# Altium PCB Test_Board.PcbDoc
Units mm, origin at the board's own origin, x right, y up, seen from the top; angles counter-clockwise.
Board outline 85.6 x 53.98 mm, 2 copper layers (Top Layer, Bottom Layer); 11 components, 9 nets, 30 pads, 0 vias.
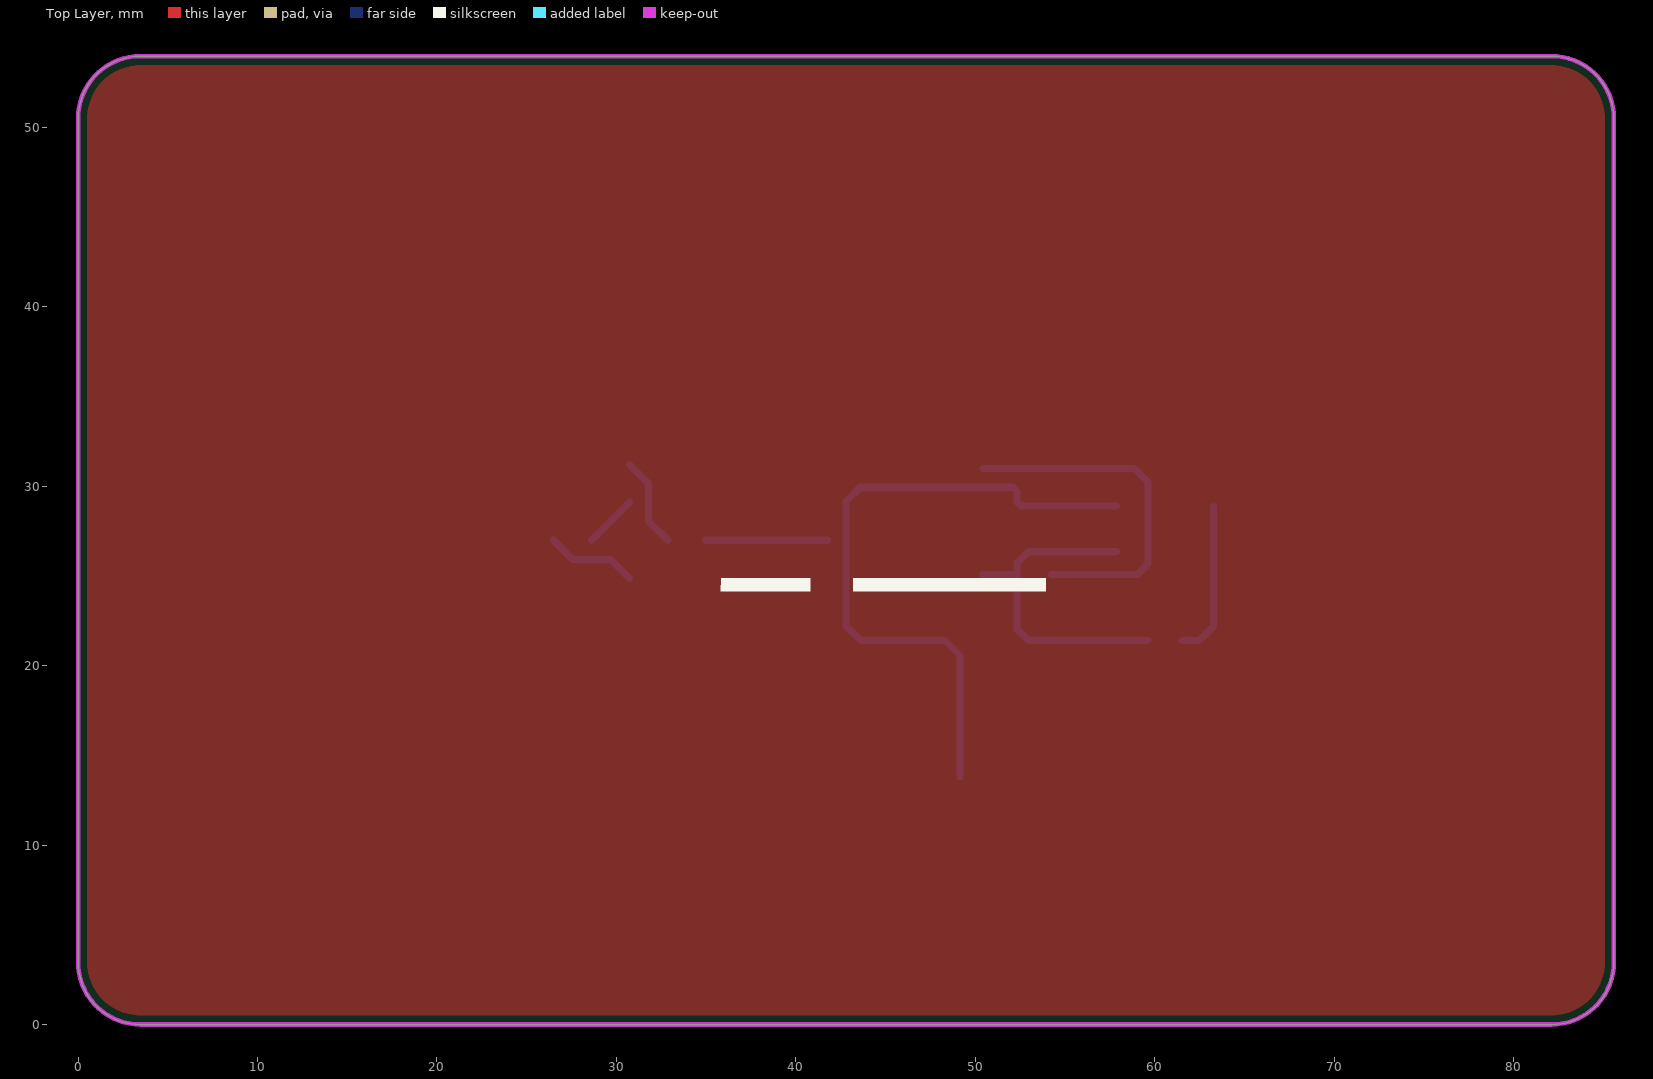
[diagram p0: Top Layer view]
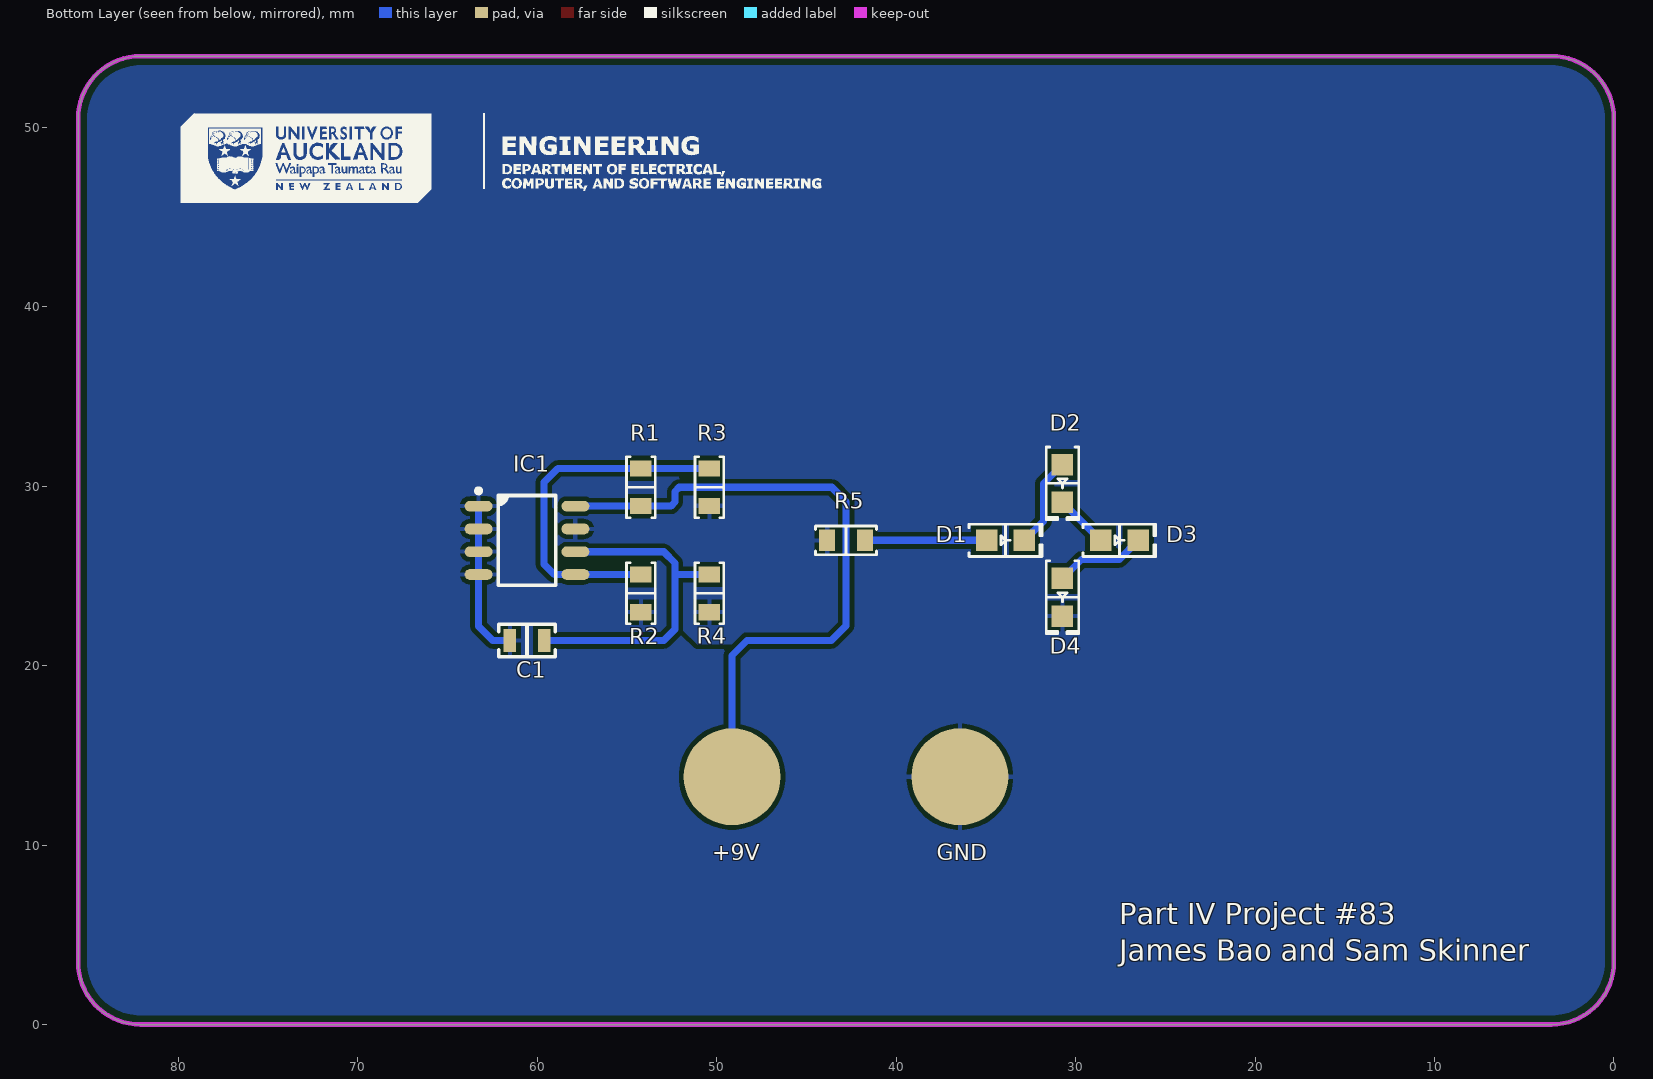
[diagram p1: Bottom Layer view, seen from below]

## Layer stack, top to bottom
Top Solder: solder mask 0.0102, Solder Resist, Dk 3.5
Top Layer: signal copper 0.0356
Dielectric 1: dielectric 0.32, FR-4, Dk 4.8
Bottom Layer: signal copper 0.0356
Bottom Solder: solder mask 0.0102, Solder Resist, Dk 3.5

## Board outline
0,3.469 ccw(c3.469,3.469) 3.469,0 82.129,0 ccw(c82.129,3.469) 85.598,3.469 85.598,50.506 ccw(c82.129,50.506) 82.129,53.975 3.469,53.975 ccw(c3.469,50.506) 0,50.506
cut-out: -60.96,-46.101 -60.706,-46.101 -60.706,-45.847 -60.96,-45.847
cut-out: -60.96,-46.101 -60.706,-46.101 -60.706,-45.847 -60.96,-45.847
cut-out: -60.96,-46.101 -60.706,-46.101 -60.706,-45.847 -60.96,-45.847
cut-out: -60.96,-46.101 -60.706,-46.101 -60.706,-45.847 -60.96,-45.847
cut-out: -60.96,-46.101 -60.706,-46.101 -60.706,-45.847 -60.96,-45.847

## Design rules (kind name [scope] priority, off if disabled: settings)
BoardOutlineClearance [All] p1: gap=0.508 ignorepadtopadclearanceinfootprint=FALSE
Clearance [All] p1: gap=0.254 ignorepadtopadclearanceinfootprint=FALSE except(0: Arc-Hole Track-Hole SMDPad-Hole THPad-Hole Via-Hole Fill-Hole Poly-Hole Region-Hole Text-Hole)
PolygonConnect [All] p1: connectstyle=Relief reliefconductorwidth=0.254 reliefentries=4 polygonreliefangle="90 Angle" airgapwidth=0.254
RoutingVias [All] p1: holewidth=0.711 width=1.27 viastyle="Through Hole" minholewidth=0.711 minwidth=1.27 maxholewidth=0.711 maxwidth=1.27
SilkToSolderMaskClearance [IsPad] p1: minsilkscreentomaskgap=0.15 clearancetoexposedcopper=TRUE
SolderMaskExpansion [All] p1: expansion=0.102 istentingtop=FALSE
SupplyNets "Schematic Supply Nets_1" [InNet('+9V')] p1: voltage=0.000
SupplyNets "Schematic Supply Nets" [InNet('GND')] p2: voltage=0.000
Width [All] p1: maxlimit=10 minlimit=0.254 preferedwidth=0.4
29 further rules are at their usual default settings.

## Components (designator, comment, footprint, x,y, rotation, side; value= is the part's Value field where it differs from the comment)
C1 "0.1 µF" "MURATA GRM21B 0805_2012" 60.579,21.4 r180 bottom
D1 "Green" "LED 0805_2012 GREEN" 33.909,26.988 r180 bottom
D2 "Green" "LED 0805_2012 GREEN" 30.734,30.163 r270 bottom
D3 "Green" "LED 0805_2012 GREEN" 27.559,26.988 r180 bottom
D4 "Green" "LED 0805_2012 GREEN" 30.734,23.813 r270 bottom
IC1 "LM2904DR" "TI SOIC-8 D" 60.579,26.988 r180 bottom
R1 "100 kΩ" "YAGEO RES 0805_2012" 54.229,29.943 r90 bottom
R2 "100 kΩ" "YAGEO RES 0805_2012" 54.229,24.033 r270 bottom
R3 "100 kΩ" "YAGEO RES 0805_2012" 50.419,29.943 r270 bottom
R4 "1 MΩ" "YAGEO RES 0805_2012" 50.419,24.033 r270 bottom
R5 "4.7 Ohms" "YAGEO RES 0805_2012" 42.799,26.988 r180 bottom

## Footprints (in the part's own frame and the unit in brackets; to place one, negate y for a bottom-side part, rotate by r counter-clockwise, add the part's x,y. Pads: shape width x height; smd on the part's side, far side on the other; paste and mask are expansions set on the pad)
"LED 0805_2012 GREEN" [mm] "Chip Diode, 2-Leads, Body 2.00x1.25mm, IPC Medium Density"
  rect 1.2x1.2 smd: 1(-1.05,0) 2(1.05,0)
  silkscreen extent -2.03,-0.9 2.03,0.9, body extent -1,-0.63 1,0.63, height 0.9
"MURATA GRM21B 0805_2012" [mm] "Chip Capacitor, 2-Leads, Body 2.00x1.25mm"
  rect 0.7x1.3 smd: 1(-0.95,0) 2(0.95,0)
  silkscreen extent -1.58,-0.9 1.58,0.9, body extent -1,-0.63 1,0.63, height 1.25
"TI SOIC-8 D" [mm] "SOP, 8-Leads, Body 4.90x3.90mm, Pitch 1.27mm, IPC Medium Density"
  oval 1.55x0.6 smd: 1(-2.7,1.905) 2(-2.7,0.635) 3(-2.7,-0.635) 4(-2.7,-1.905) 5(2.7,-1.905) 6(2.7,-0.635) 7(2.7,0.635) 8(2.7,1.905)
  silkscreen extent -2.83,-2.5 1.6,2.88, body extent -3.01,-2.45 3.01,2.45, height 1.5
"YAGEO RES 0805_2012" [mm] "Chip Resistor, 2-Leads, Body 2.00x1.25mm"
  rect 0.9x1.2 smd: 1(-1.05,0) 2(1.05,0)
  silkscreen extent -1.7,-0.8 1.7,0.8, body extent -1,-0.62 1,0.63, height 0.6

## Part data
C1: library part GRM21B7U1A104JA01L, "CAP CER 0.1UF 10V U2J 0805"
D1 D2 D3 D4: library part LTST-C170KGKT, "LED GREEN CLEAR SMD"
IC1: "IC OPAMP GP 2 CIRCUIT 8SOIC"
R1 R2 R3: library part RT0805DRD07100KL, "RES SMD 100K OHM 0.5% 1/8W 0805"
R4: library part RT0805BRD071ML, "RES SMD 1M OHM 0.1% 1/8W 0805"
R5: library part AC0805FR-7W4R7L, "RES CHIP 0805"

## Free pads (board coordinates)
  round 5.4 smd far side paste-2539.97: 2(49.149,13.81) 3(36.449,13.81)

## Nets (pads, with @x,y where several pads share a name; then routed paths per layer and width w, separated by ;. In a path a pad name is that pad's centre, name@x,y a point inside that pad or via, vN(x,y) a via of type N, cw(c..) or ccw(c..) an arc to the next point about the centre after c; other vN are vias at no path point)
+9V: IC1.8 pad.2 R1.1 | length 36.9
  Bottom Layer w0.4: pad.2 49.149,20.574 48.323,21.4 43.622,21.4 42.799,22.223 42.799,29.147 43.595,29.943 52.09,29.943 52.324,29.708 52.324,29.127 52.558,28.893 IC1.8
GND: C1.1 D4.2 IC1.1 IC1.2 IC1.3 IC1.4 pad.3 R2.2 | length 8.8
  Bottom Layer w0.4: C1.1 62.484,21.4 63.279,22.195 IC1.4 IC1.3 IC1.2 IC1.1
INV: C1.2 IC1.6 R4.1 | length 19
  Bottom Layer w0.4: R4.1 52.324,25.083 ; IC1.6 52.959,26.353 52.324,25.718 52.324,25.083 ; C1.2 52.959,21.4 52.324,22.035 52.324,25.083
NetD1_2: D1.2 D2.1 | length 5.1
  Bottom Layer w0.4: D2.1 31.797,30.15 31.797,28.05 D1.2
NetD2_2: D2.2 D3.1 | length 3
  Bottom Layer w0.4: D3.1 D2.2
NetD3_2: D3.2 D4.1 | length 5.1
  Bottom Layer w0.4: D3.2 27.572,25.925 29.672,25.925 D4.1
NON_INV: IC1.5 R1.2 R2.1 R3.1 | length 19.7
  Bottom Layer w0.4: R3.1@50.453,30.993 R1.2 58.86,30.993 59.629,30.224 59.629,25.657 59.055,25.083 R2.1
V_LEDS: D1.1 R5.2 | length 6.8
  Bottom Layer w0.4: D1.1 R5.2
V_OUT: IC1.7 R3.2 R4.2 R5.1

## Polygon pours and split planes (outlines as drawn)
no net on Top Solder "NONET_L-01_P-001" (solid): 81.788,3.81 81.28,3.81 cw(c81.28,3.937) 81.153,3.937 81.153,4.318 cw(c81.28,4.318) 81.28,4.445 81.661,4.445 cw(c81.661,4.318) 81.788,4.318
no net on Top Solder "NONET_L-01_P-001" (solid): 3.81,13.81 4.318,13.81 cw(c4.318,13.683) 4.445,13.683 4.445,13.302 cw(c4.318,13.302) 4.318,13.175 3.937,13.175 cw(c3.937,13.302) 3.81,13.302
no net on Top Solder "NONET_L-01_P-001" (solid): 42.799,3.81 42.799,3.302 cw(c42.672,3.302) 42.672,3.175 42.291,3.175 cw(c42.291,3.302) 42.164,3.302 42.164,3.683 cw(c42.291,3.683) 42.291,3.81
no net on Top Solder "NONET_L-01_P-001" (solid): 3.81,26.987 3.81,26.479 cw(c3.683,26.479) 3.683,26.352 3.302,26.352 cw(c3.302,26.479) 3.175,26.479 3.175,26.86 cw(c3.302,26.86) 3.302,26.987
no net on Top Solder "NONET_L-01_P-001" (solid): 71.788,50.165 71.28,50.165 cw(c71.28,50.292) 71.153,50.292 71.153,50.673 cw(c71.28,50.673) 71.28,50.8 71.661,50.8 cw(c71.661,50.673) 71.788,50.673
no net on Top Solder "NONET_L-01_P-001" (solid): 81.788,50.165 81.788,50.673 cw(c81.915,50.673) 81.915,50.8 82.296,50.8 cw(c82.296,50.673) 82.423,50.673 82.423,50.292 cw(c82.296,50.292) 82.296,50.165
no net on Top Solder "NONET_L-01_P-001" (solid): 42.799,50.165 42.291,50.165 cw(c42.291,50.292) 42.164,50.292 42.164,50.673 cw(c42.291,50.673) 42.291,50.8 42.672,50.8 cw(c42.672,50.673) 42.799,50.673
no net on Top Solder "NONET_L-01_P-001" (solid): 3.81,3.81 3.81,4.318 cw(c3.937,4.318) 3.937,4.445 4.318,4.445 cw(c4.318,4.318) 4.445,4.318 4.445,3.937 cw(c4.318,3.937) 4.318,3.81
no net on Top Solder "NONET_L-01_P-001" (solid): 81.788,40.165 82.296,40.165 cw(c82.296,40.038) 82.423,40.038 82.423,39.657 cw(c82.296,39.657) 82.296,39.53 81.915,39.53 cw(c81.915,39.657) 81.788,39.657
no net on Top Solder "NONET_L-01_P-001" (solid): 81.788,50.165 81.788,49.657 cw(c81.661,49.657) 81.661,49.53 81.28,49.53 cw(c81.28,49.657) 81.153,49.657 81.153,50.038 cw(c81.28,50.038) 81.28,50.165
no net on Top Solder "NONET_L-01_P-001" (solid): 81.788,26.987 81.788,27.495 cw(c81.915,27.495) 81.915,27.622 82.296,27.622 cw(c82.296,27.495) 82.423,27.495 82.423,27.114 cw(c82.296,27.114) 82.296,26.987
no net on Top Solder "NONET_L-01_P-001" (solid): 81.788,40.165 81.28,40.165 cw(c81.28,40.292) 81.153,40.292 81.153,40.673 cw(c81.28,40.673) 81.28,40.8 81.661,40.8 cw(c81.661,40.673) 81.788,40.673
no net on Top Solder "NONET_L-01_P-001" (solid): 71.788,40.165 71.788,40.673 cw(c71.915,40.673) 71.915,40.8 72.296,40.8 cw(c72.296,40.673) 72.423,40.673 72.423,40.292 cw(c72.296,40.292) 72.296,40.165
no net on Top Solder "NONET_L-01_P-001" (solid): 3.81,50.165 3.302,50.165 cw(c3.302,50.292) 3.175,50.292 3.175,50.673 cw(c3.302,50.673) 3.302,50.8 3.683,50.8 cw(c3.683,50.673) 3.81,50.673
no net on Top Solder "NONET_L-01_P-001" (solid): 42.799,50.165 43.307,50.165 cw(c43.307,50.038) 43.434,50.038 43.434,49.657 cw(c43.307,49.657) 43.307,49.53 42.926,49.53 cw(c42.926,49.657) 42.799,49.657
no net on Top Solder "NONET_L-01_P-001" (solid): 13.81,3.81 13.302,3.81 cw(c13.302,3.937) 13.175,3.937 13.175,4.318 cw(c13.302,4.318) 13.302,4.445 13.683,4.445 cw(c13.683,4.318) 13.81,4.318
no net on Top Solder "NONET_L-01_P-001" (solid): 13.81,3.81 14.318,3.81 cw(c14.318,3.683) 14.445,3.683 14.445,3.302 cw(c14.318,3.302) 14.318,3.175 13.937,3.175 cw(c13.937,3.302) 13.81,3.302
no net on Top Solder "NONET_L-01_P-001" (solid): 81.788,3.81 82.296,3.81 cw(c82.296,3.683) 82.423,3.683 82.423,3.302 cw(c82.296,3.302) 82.296,3.175 81.915,3.175 cw(c81.915,3.302) 81.788,3.302
no net on Top Solder "NONET_L-01_P-001" (solid): 3.81,3.81 3.81,3.302 cw(c3.683,3.302) 3.683,3.175 3.302,3.175 cw(c3.302,3.302) 3.175,3.302 3.175,3.683 cw(c3.302,3.683) 3.302,3.81
no net on Top Solder "NONET_L-01_P-001" (solid): 71.788,40.165 71.788,39.657 cw(c71.661,39.657) 71.661,39.53 71.28,39.53 cw(c71.28,39.657) 71.153,39.657 71.153,40.038 cw(c71.28,40.038) 71.28,40.165
no net on Top Solder "NONET_L-01_P-001" (solid): 81.788,26.987 81.788,26.479 cw(c81.661,26.479) 81.661,26.352 81.28,26.352 cw(c81.28,26.479) 81.153,26.479 81.153,26.86 cw(c81.28,26.86) 81.28,26.987
no net on Top Solder "NONET_L-01_P-001" (solid): 13.81,13.81 13.81,14.318 cw(c13.937,14.318) 13.937,14.445 14.318,14.445 cw(c14.318,14.318) 14.445,14.318 14.445,13.937 cw(c14.318,13.937) 14.318,13.81
no net on Top Solder "NONET_L-01_P-001" (solid): 13.81,13.81 13.81,13.302 cw(c13.683,13.302) 13.683,13.175 13.302,13.175 cw(c13.302,13.302) 13.175,13.302 13.175,13.683 cw(c13.302,13.683) 13.302,13.81
no net on Top Solder "NONET_L-01_P-001" (solid): 71.788,50.165 72.296,50.165 cw(c72.296,50.038) 72.423,50.038 72.423,49.657 cw(c72.296,49.657) 72.296,49.53 71.915,49.53 cw(c71.915,49.657) 71.788,49.657
no net on Top Solder "NONET_L-01_P-001" (solid): 3.81,26.987 3.81,27.495 cw(c3.937,27.495) 3.937,27.622 4.318,27.622 cw(c4.318,27.495) 4.445,27.495 4.445,27.114 cw(c4.318,27.114) 4.318,26.987
no net on Top Solder "NONET_L-01_P-001" (solid): 42.799,3.81 42.799,4.318 cw(c42.926,4.318) 42.926,4.445 43.307,4.445 cw(c43.307,4.318) 43.434,4.318 43.434,3.937 cw(c43.307,3.937) 43.307,3.81
no net on Top Solder "NONET_L-01_P-001" (solid): 3.81,13.81 3.302,13.81 cw(c3.302,13.937) 3.175,13.937 3.175,14.318 cw(c3.302,14.318) 3.302,14.445 3.683,14.445 cw(c3.683,14.318) 3.81,14.318
no net on Top Solder "NONET_L-01_P-001" (solid): 3.81,50.165 4.318,50.165 cw(c4.318,50.038) 4.445,50.038 4.445,49.657 cw(c4.318,49.657) 4.318,49.53 3.937,49.53 cw(c3.937,49.657) 3.81,49.657
V_OUT on Bottom Layer "NONET_L-01_P-001" (solid, pour order 0): 52.706,28.893 52.471,29.127 52.471,29.708 52.237,29.943 43.595,29.943 42.799,29.147 42.799,22.023 43.663,21.2 51.079,21.2 52.324,22.386 52.324,25.718 52.959,26.353 58.611,26.353 58.928,26.67 58.928,28.624 58.66,28.893
GND on Bottom Layer "NONET_L-01_P-001" (solid, pour order 2): 0,50.506 cw(c3.469,50.506) 3.469,53.975 82.129,53.975 cw(c82.129,50.506) 85.598,50.506 85.598,3.469 cw(c82.129,3.469) 82.129,0 3.469,0 cw(c3.469,3.469) 0,3.469 0,18.554
no net on Top Layer "TOP PLANE" (solid, pour order 1): 0,50.506 cw(c3.469,50.506) 3.469,53.975 82.129,53.975 cw(c82.129,50.506) 85.598,50.506 85.598,3.469 cw(c82.129,3.469) 82.129,0 3.469,0 cw(c3.469,3.469) 0,3.469 0,18.554
no net on Bottom Solder "NONET_L-01_P-001" (solid): 3.81,3.81 4.318,3.81 ccw(c4.318,3.937) 4.445,3.937 4.445,4.318 ccw(c4.318,4.318) 4.318,4.445 3.937,4.445 ccw(c3.937,4.318) 3.81,4.318
no net on Bottom Solder "NONET_L-01_P-001" (solid): 42.799,3.81 42.799,3.302 ccw(c42.926,3.302) 42.926,3.175 43.307,3.175 ccw(c43.307,3.302) 43.434,3.302 43.434,3.683 ccw(c43.307,3.683) 43.307,3.81
no net on Bottom Solder "NONET_L-01_P-001" (solid): 42.799,3.81 42.799,4.318 ccw(c42.672,4.318) 42.672,4.445 42.291,4.445 ccw(c42.291,4.318) 42.164,4.318 42.164,3.937 ccw(c42.291,3.937) 42.291,3.81
no net on Bottom Solder "NONET_L-01_P-001" (solid): 71.788,13.81 71.788,13.302 ccw(c71.915,13.302) 71.915,13.175 72.296,13.175 ccw(c72.296,13.302) 72.423,13.302 72.423,13.683 ccw(c72.296,13.683) 72.296,13.81
no net on Bottom Solder "NONET_L-01_P-001" (solid): 71.788,13.81 71.788,14.318 ccw(c71.661,14.318) 71.661,14.445 71.28,14.445 ccw(c71.28,14.318) 71.153,14.318 71.153,13.937 ccw(c71.28,13.937) 71.28,13.81
no net on Bottom Solder "NONET_L-01_P-001" (solid): 71.788,3.81 72.296,3.81 ccw(c72.296,3.937) 72.423,3.937 72.423,4.318 ccw(c72.296,4.318) 72.296,4.445 71.915,4.445 ccw(c71.915,4.318) 71.788,4.318
no net on Bottom Solder "NONET_L-01_P-001" (solid): 71.788,3.81 71.28,3.81 ccw(c71.28,3.683) 71.153,3.683 71.153,3.302 ccw(c71.28,3.302) 71.28,3.175 71.661,3.175 ccw(c71.661,3.302) 71.788,3.302
no net on Bottom Solder "NONET_L-01_P-001" (solid): 81.788,3.81 81.788,3.302 ccw(c81.915,3.302) 81.915,3.175 82.296,3.175 ccw(c82.296,3.302) 82.423,3.302 82.423,3.683 ccw(c82.296,3.683) 82.296,3.81
no net on Bottom Solder "NONET_L-01_P-001" (solid): 81.788,3.81 81.788,4.318 ccw(c81.661,4.318) 81.661,4.445 81.28,4.445 ccw(c81.28,4.318) 81.153,4.318 81.153,3.937 ccw(c81.28,3.937) 81.28,3.81
no net on Bottom Solder "NONET_L-01_P-001" (solid): 81.788,13.81 81.28,13.81 ccw(c81.28,13.683) 81.153,13.683 81.153,13.302 ccw(c81.28,13.302) 81.28,13.175 81.661,13.175 ccw(c81.661,13.302) 81.788,13.302
no net on Bottom Solder "NONET_L-01_P-001" (solid): 81.788,13.81 82.296,13.81 ccw(c82.296,13.937) 82.423,13.937 82.423,14.318 ccw(c82.296,14.318) 82.296,14.445 81.915,14.445 ccw(c81.915,14.318) 81.788,14.318
no net on Bottom Solder "NONET_L-01_P-001" (solid): 81.788,26.987 81.788,26.479 ccw(c81.915,26.479) 81.915,26.352 82.296,26.352 ccw(c82.296,26.479) 82.423,26.479 82.423,26.86 ccw(c82.296,26.86) 82.296,26.987
no net on Bottom Solder "NONET_L-01_P-001" (solid): 81.788,26.987 81.788,27.495 ccw(c81.661,27.495) 81.661,27.622 81.28,27.622 ccw(c81.28,27.495) 81.153,27.495 81.153,27.114 ccw(c81.28,27.114) 81.28,26.987
no net on Bottom Solder "NONET_L-01_P-001" (solid): 81.788,50.165 82.296,50.165 ccw(c82.296,50.292) 82.423,50.292 82.423,50.673 ccw(c82.296,50.673) 82.296,50.8 81.915,50.8 ccw(c81.915,50.673) 81.788,50.673
no net on Bottom Solder "NONET_L-01_P-001" (solid): 81.788,50.165 81.28,50.165 ccw(c81.28,50.038) 81.153,50.038 81.153,49.657 ccw(c81.28,49.657) 81.28,49.53 81.661,49.53 ccw(c81.661,49.657) 81.788,49.657
no net on Bottom Solder "NONET_L-01_P-001" (solid): 42.799,50.165 43.307,50.165 ccw(c43.307,50.292) 43.434,50.292 43.434,50.673 ccw(c43.307,50.673) 43.307,50.8 42.926,50.8 ccw(c42.926,50.673) 42.799,50.673
no net on Bottom Solder "NONET_L-01_P-001" (solid): 42.799,50.165 42.291,50.165 ccw(c42.291,50.038) 42.164,50.038 42.164,49.657 ccw(c42.291,49.657) 42.291,49.53 42.672,49.53 ccw(c42.672,49.657) 42.799,49.657
no net on Bottom Solder "NONET_L-01_P-001" (solid): 3.81,40.165 3.302,40.165 ccw(c3.302,40.038) 3.175,40.038 3.175,39.657 ccw(c3.302,39.657) 3.302,39.53 3.683,39.53 ccw(c3.683,39.657) 3.81,39.657
no net on Bottom Solder "NONET_L-01_P-001" (solid): 3.81,40.165 4.318,40.165 ccw(c4.318,40.292) 4.445,40.292 4.445,40.673 ccw(c4.318,40.673) 4.318,40.8 3.937,40.8 ccw(c3.937,40.673) 3.81,40.673
no net on Bottom Solder "NONET_L-01_P-001" (solid): 3.81,50.165 3.81,49.657 ccw(c3.937,49.657) 3.937,49.53 4.318,49.53 ccw(c4.318,49.657) 4.445,49.657 4.445,50.038 ccw(c4.318,50.038) 4.318,50.165
no net on Bottom Solder "NONET_L-01_P-001" (solid): 3.81,50.165 3.81,50.673 ccw(c3.683,50.673) 3.683,50.8 3.302,50.8 ccw(c3.302,50.673) 3.175,50.673 3.175,50.292 ccw(c3.302,50.292) 3.302,50.165
no net on Bottom Solder "NONET_L-01_P-001" (solid): 13.81,50.165 14.318,50.165 ccw(c14.318,50.292) 14.445,50.292 14.445,50.673 ccw(c14.318,50.673) 14.318,50.8 13.937,50.8 ccw(c13.937,50.673) 13.81,50.673
no net on Bottom Solder "NONET_L-01_P-001" (solid): 13.81,50.165 13.302,50.165 ccw(c13.302,50.038) 13.175,50.038 13.175,49.657 ccw(c13.302,49.657) 13.302,49.53 13.683,49.53 ccw(c13.683,49.657) 13.81,49.657
no net on Bottom Solder "NONET_L-01_P-001" (solid): 13.81,40.165 13.81,39.657 ccw(c13.937,39.657) 13.937,39.53 14.318,39.53 ccw(c14.318,39.657) 14.445,39.657 14.445,40.038 ccw(c14.318,40.038) 14.318,40.165
no net on Bottom Solder "NONET_L-01_P-001" (solid): 13.81,40.165 13.81,40.673 ccw(c13.683,40.673) 13.683,40.8 13.302,40.8 ccw(c13.302,40.673) 13.175,40.673 13.175,40.292 ccw(c13.302,40.292) 13.302,40.165
no net on Bottom Solder "NONET_L-01_P-001" (solid): 3.81,26.987 3.81,26.479 ccw(c3.937,26.479) 3.937,26.352 4.318,26.352 ccw(c4.318,26.479) 4.445,26.479 4.445,26.86 ccw(c4.318,26.86) 4.318,26.987
no net on Bottom Solder "NONET_L-01_P-001" (solid): 3.81,26.987 3.81,27.495 ccw(c3.683,27.495) 3.683,27.622 3.302,27.622 ccw(c3.302,27.495) 3.175,27.495 3.175,27.114 ccw(c3.302,27.114) 3.302,26.987
no net on Bottom Solder "NONET_L-01_P-001" (solid): 3.81,3.81 3.302,3.81 ccw(c3.302,3.683) 3.175,3.683 3.175,3.302 ccw(c3.302,3.302) 3.302,3.175 3.683,3.175 ccw(c3.683,3.302) 3.81,3.302

## Keep-outs
Keep-Out Layer:
  the board outline again, w0.254

## Silkscreen, mask and mechanical layers (free items; w line width, h text height)
Top Overlay:
  region: 52.941,24.876 53.94,24.864 53.928,24.147 43.204,24.159 43.215,24.876 52.918,24.876
  region: 38.329,24.876 40.807,24.864 40.795,24.147 35.827,24.159 35.85,24.864 38.305,24.876
Bottom Overlay:
  drawing of 98 lines, arcs and shapes, not listed
  text "GND" at 37.731,8.845 h1.52
  text "+9V" at 50.246,8.837 h1.52
  text "Part IV Project #83 / James Bao and Sam Skinner" at 27.559,3.175 h2.03
Top Solder:
  drawing of 7 lines, arcs and shapes, not listed